# Altium PCB Bluetooth_Sentinel.PcbDoc
Units mm, origin at the board's own origin, x right, y up, seen from the top; angles counter-clockwise.
Board outline 80 x 55 mm, 4 copper layers (Top Layer, Mid-Layer 1, Mid-Layer 2, Bottom Layer), stack 0.796 mm thick; 73 components, 57 nets, 224 pads, 173 vias.
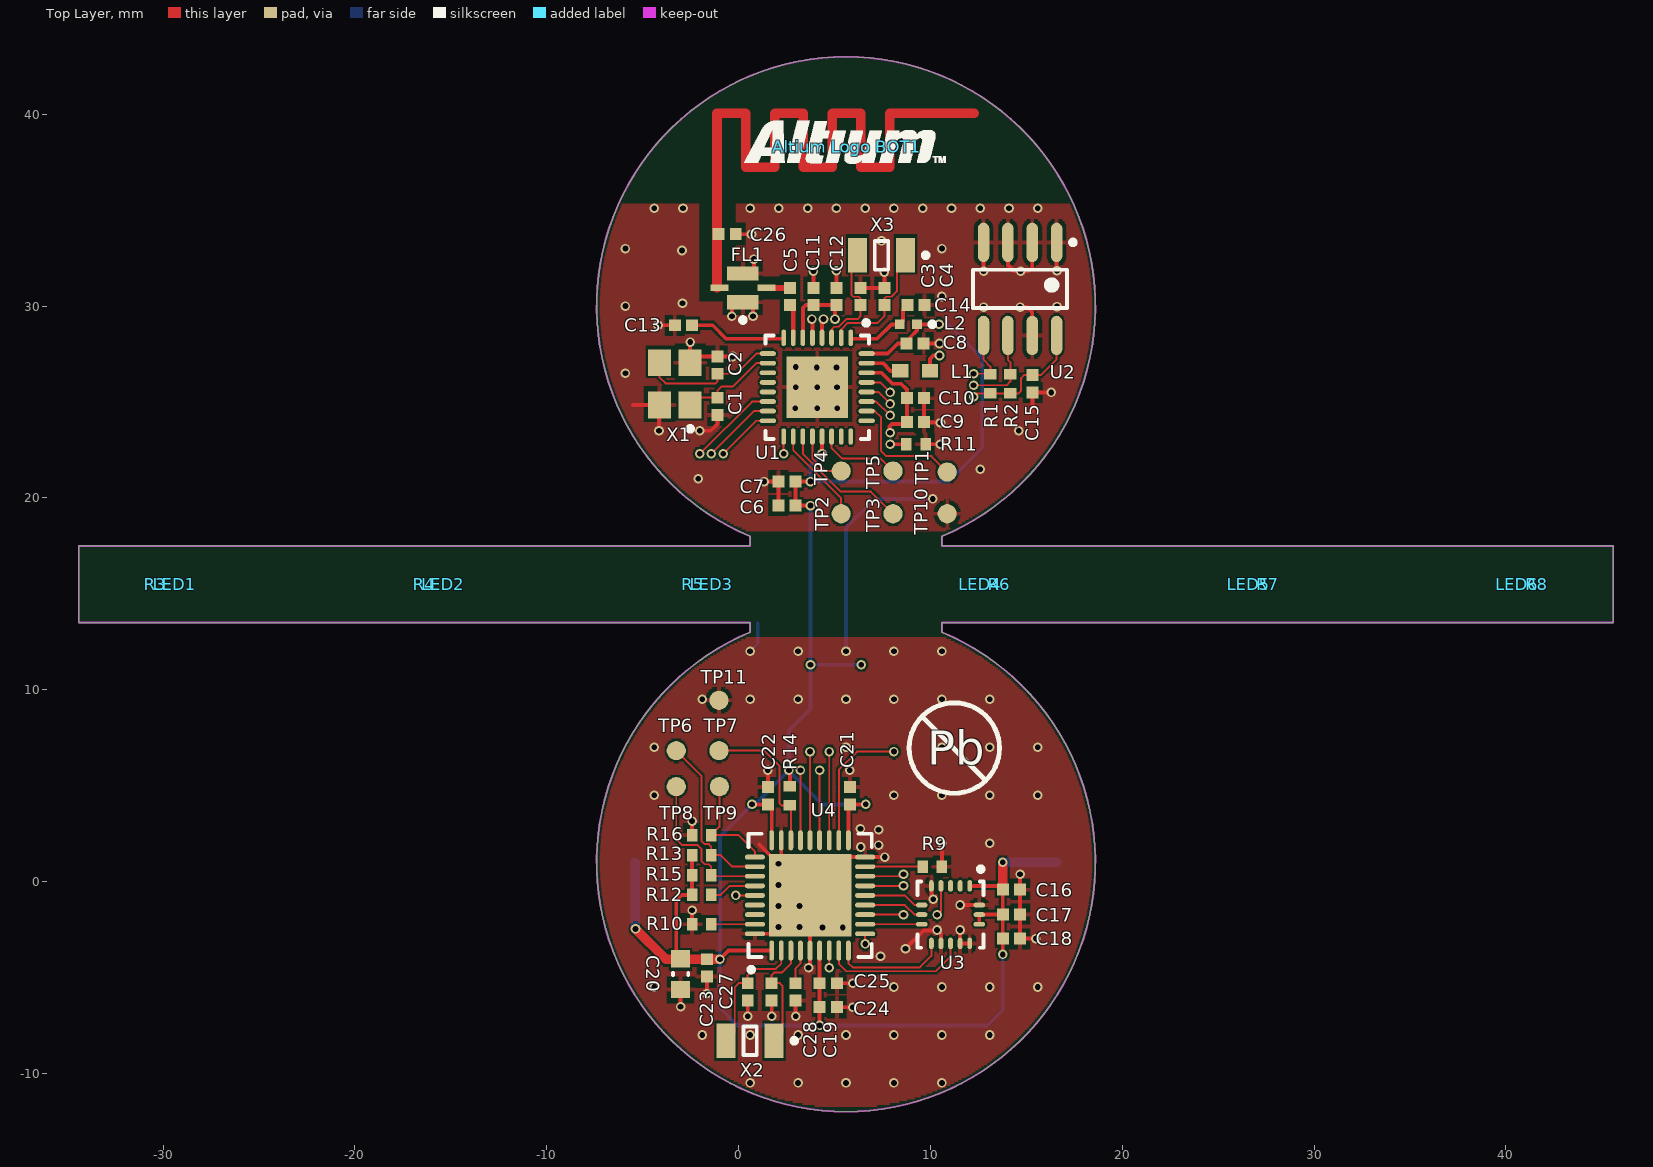
[diagram p0: Top Layer view]
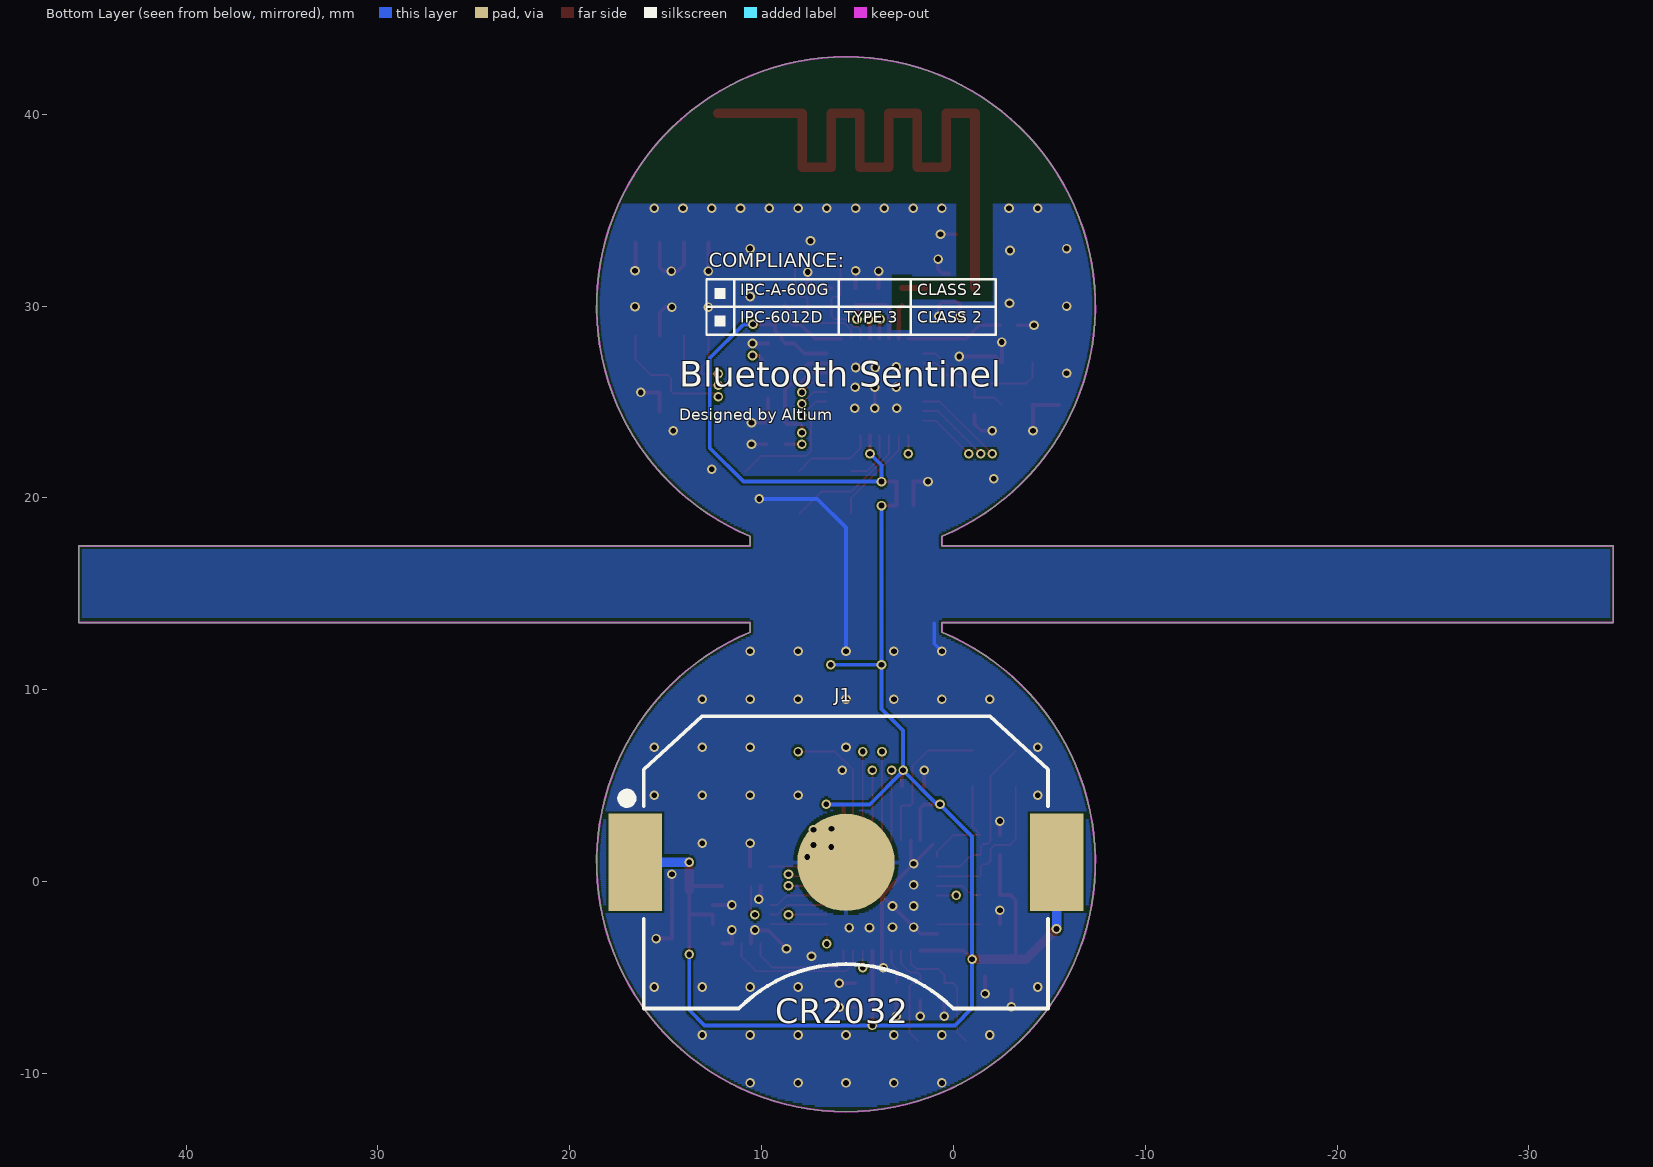
[diagram p1: Bottom Layer view, seen from below]
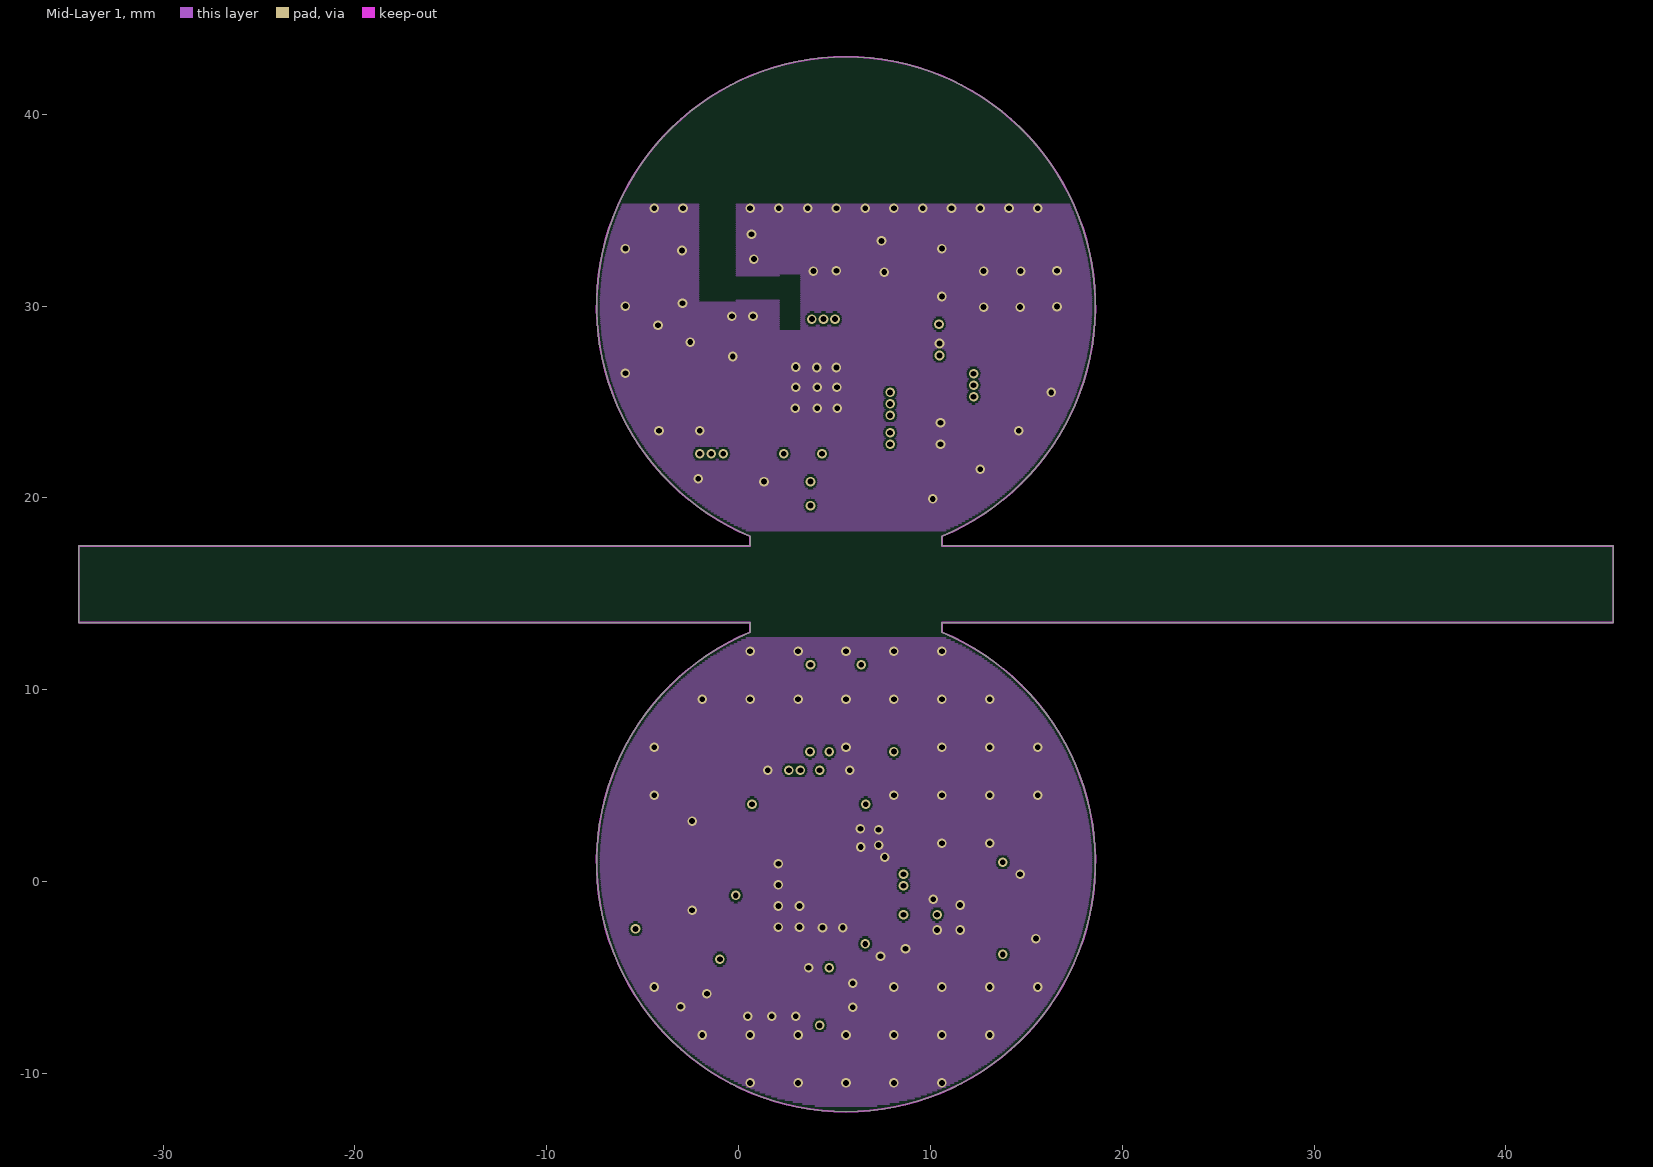
[diagram p2: Mid-Layer 1]
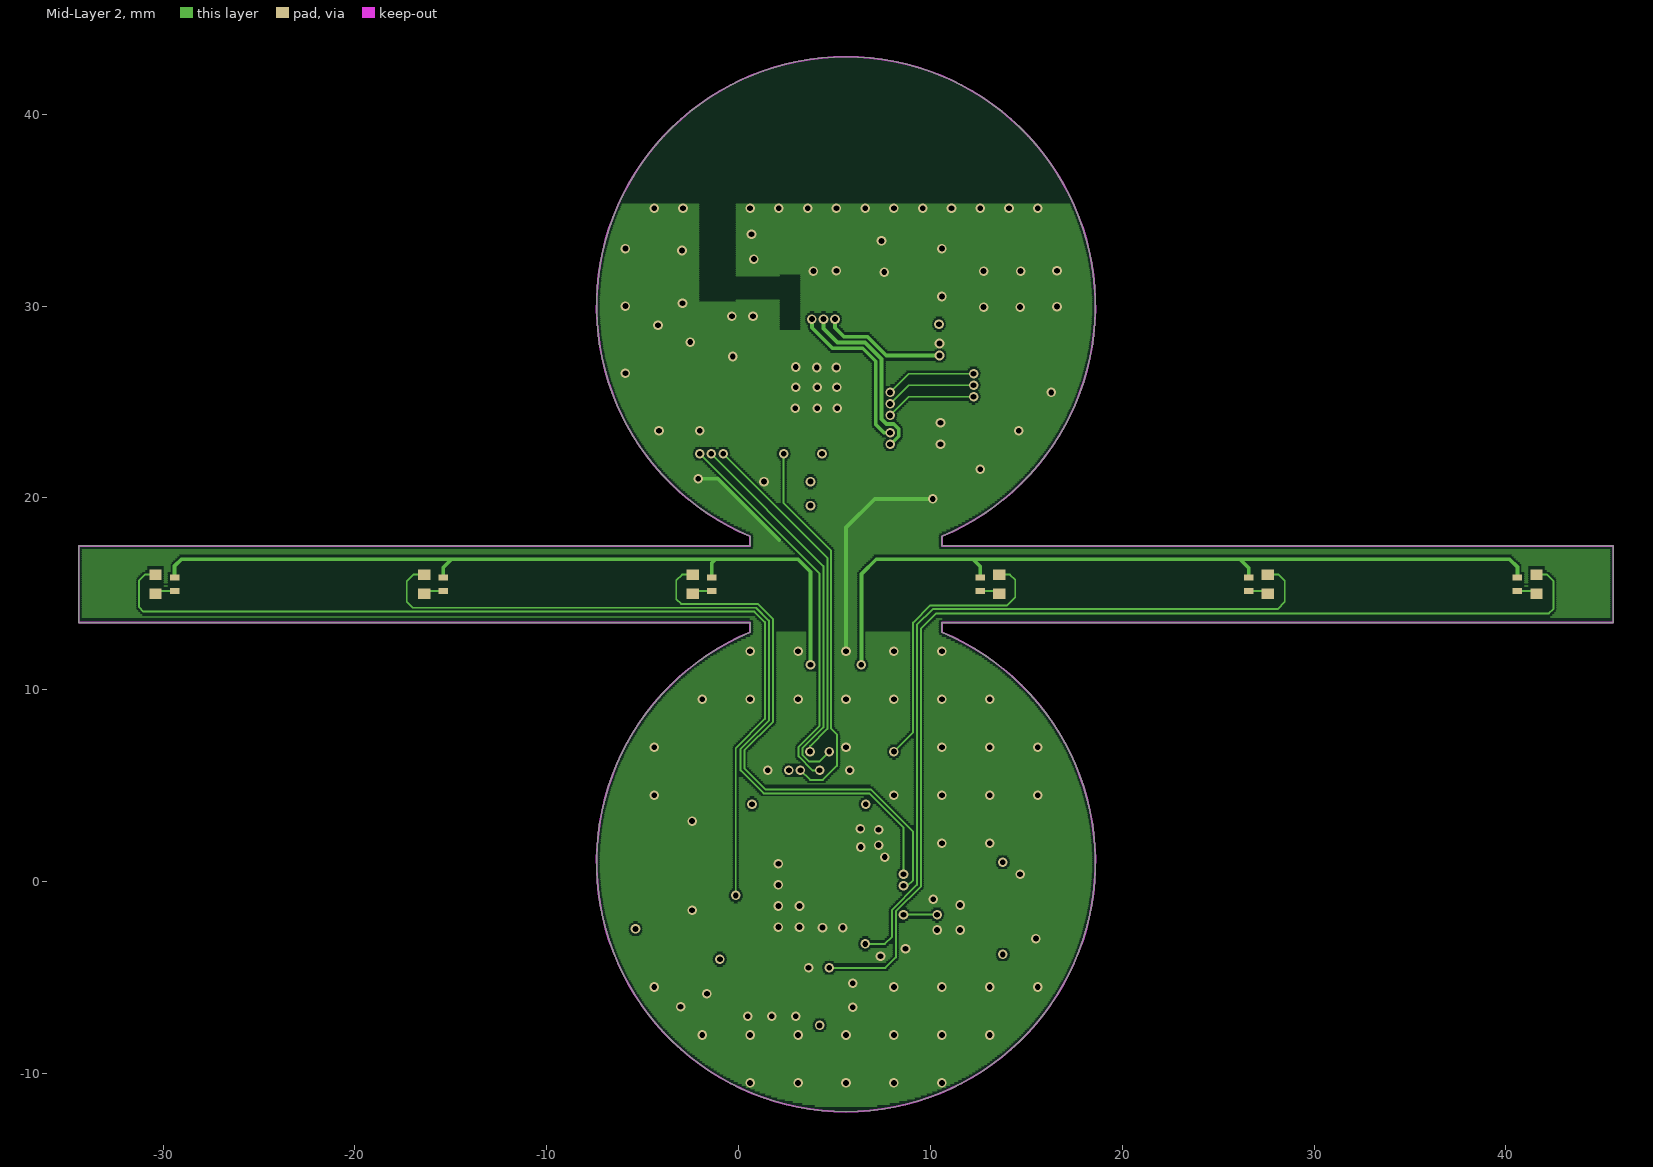
[diagram p3: Mid-Layer 2]

## Layer stack, top to bottom
Top Solder: solder mask 0.01, Solder Resist, Dk 3.5
Top Layer: signal copper 0.036
Dielectric 1: dielectric 0.32, FR-4, Dk 4.8
Mid-Layer 1: signal copper 0.036
Dielectric 2: dielectric 0.32, FR-4, Dk 4.8
Mid-Layer 2: signal copper 0.036
Dielectric 3: dielectric 0.0125, Polyamide, Dk 4.8
Bottom Layer: signal copper 0.036
Bottom Solder: solder mask 0.01, Solder Resist, Dk 3.5

## Board outline
-34.4,13.5 0.6,13.5 0.6,13 ccw(c5.6,1) 10.6,13 10.6,13.5 45.6,13.5 45.6,17.5 10.6,17.5 10.6,18 ccw(c5.6,30) 0.6,18 0.6,17.5 -34.4,17.5
board region "Layer Stack Region 2": 0.6,18 0.085,18.215 -0.905,18.731 -1.848,19.33 -2.735,20.008 -3.561,20.759 -4.319,21.579 -5.005,22.46 -5.612,23.397 -6.137,24.383 -6.575,25.41 -6.924,26.47 -7.181,27.557 -7.343,28.662 -7.41,29.776 -7.381,30.892 -7.257,32.002 -7.038,33.097 -6.726,34.169 -6.323,35.21 -5.833,36.213 -5.258,37.171 -4.603,38.075 -3.873,38.92 -3.074,39.7 -2.21,40.407 -1.289,41.039 -0.317,41.589 0.698,42.053 1.749,42.429 2.829,42.714 3.929,42.904 5.042,43 6.158,43 7.271,42.904 8.371,42.714 9.451,42.429 10.502,42.053 11.517,41.589 12.489,41.039 13.41,40.407 14.274,39.7 15.073,38.92 15.803,38.075 16.458,37.171 17.033,36.213 17.523,35.21 17.926,34.169 18.238,33.097 18.457,32.002 18.581,30.892 18.61,29.776 18.543,28.662 18.381,27.557 18.124,26.47 17.775,25.41 17.337,24.383 16.812,23.397 16.205,22.46 15.519,21.579 14.761,20.759 13.935,20.008 13.048,19.33 12.105,18.731 11.115,18.215 10.6,18
board region "Layer Stack Region 1": 10.6,13 11.115,12.785 12.105,12.269 13.048,11.67 13.935,10.992 14.761,10.241 15.519,9.421 16.205,8.54 16.812,7.603 17.337,6.617 17.775,5.59 18.124,4.53 18.381,3.443 18.543,2.338 18.61,1.224 18.581,0.108 18.457,-1.002 18.238,-2.097 17.926,-3.169 17.523,-4.21 17.033,-5.213 16.458,-6.171 15.803,-7.075 15.073,-7.92 14.274,-8.7 13.41,-9.407 12.489,-10.039 11.517,-10.589 10.502,-11.053 9.451,-11.429 8.371,-11.714 7.271,-11.904 6.158,-12 5.042,-12 3.929,-11.904 2.829,-11.714 1.749,-11.429 0.698,-11.053 -0.317,-10.589 -1.289,-10.039 -2.21,-9.407 -3.074,-8.7 -3.873,-7.92 -4.603,-7.075 -5.258,-6.171 -5.833,-5.213 -6.323,-4.21 -6.726,-3.169 -7.038,-2.097 -7.257,-1.002 -7.381,0.108 -7.41,1.224 -7.343,2.338 -7.181,3.443 -6.924,4.53 -6.575,5.59 -6.137,6.617 -5.612,7.603 -5.005,8.54 -4.319,9.421 -3.561,10.241 -2.735,10.992 -1.848,11.67 -0.905,12.269 0.085,12.785 0.597,12.999
board region "Layer Stack Region 3": 10.6,18 10.6,17.5 45.6,17.5 45.6,13.5 10.6,13.5 10.6,13 0.597,12.999 0.6,13 0.6,13.5 -34.4,13.5 -34.4,17.5 0.6,17.5 0.6,18

## Design rules (kind name [scope] priority, off if disabled: settings)
Clearance [All] p1: gap=0.1 ignorepadtopadclearanceinfootprint=FALSE except(0: Arc-Hole Track-Hole SMDPad-Hole THPad-Hole Via-Hole Fill-Hole Poly-Hole Region-Hole Text-Hole)
ComponentClearance [All] p1: gap=0.2 collisioncheckmode=3 verticalgap=0.2 showdistances=FALSE
DiffPairsRouting [All] p1: maxlimit=0.254 minlimit=0.254 mostfreqgap=0.254 substack1={39C75CA3-85F5-4F93-B76E-2A553D0696AA} toplayer_{39c75ca3-85f5-4f93-b76e-2a553d0696aa}_minwidth=0.381 toplayer_{39c75ca3-85f5-4f93-b76e-2a553d0696aa}_maxwidth=0.381 toplayer_{39c75ca3-85f5-4f93-b76e-2a553d0696aa}_prefwidth=0.381 midlayer1_{39c75ca3-85f5-4f93-b76e-2a553d0696aa}_minwidth=0.381 midlayer1_{39c75ca3-85f5-4f93-b76e-2a553d0696aa}_maxwidth=0.381 midlayer1_{39c75ca3-85f5-4f93-b76e-2a553d0696aa}_prefwidth=0.381 midlayer2_{39c75ca3-85f5-4f93-b76e-2a553d0696aa}_minwidth=0.381 midlayer2_{39c75ca3-85f5-4f93-b76e-2a553d0696aa}_maxwidth=0.381 midlayer2_{39c75ca3-85f5-4f93-b76e-2a553d0696aa}_prefwidth=0.381 bottomlayer_{39c75ca3-85f5-4f93-b76e-2a553d0696aa}_minwidth=0.381 bottomlayer_{39c75ca3-85f5-4f93-b76e-2a553d0696aa}_maxwidth=0.381 bottomlayer_{39c75ca3-85f5-4f93-b76e-2a553d0696aa}_prefwidth=0.381 toplayer_minwidth=0.381 toplayer_maxwidth=0.381 toplayer_prefwidth=0.381 midlayer1_minwidth=0.381 midlayer1_maxwidth=0.381 midlayer1_prefwidth=0.381 midlayer2_minwidth=0.381 midlayer2_maxwidth=0.381 midlayer2_prefwidth=0.381 bottomlayer_minwidth=0.381 bottomlayer_maxwidth=0.381 bottomlayer_prefwidth=0.381 maxuncoupledlength=12.7
HoleToHoleClearance [All] p1: gap=0.1 allowstackedmicrovias=TRUE
MinimumSolderMaskSliver [All] p1: minsoldermaskwidth=0.1
NetAntennae [All] p1: netantennaetolerance=30
PolygonConnect PolygonConnect_PCBModule [InComponentClass('PCBModule')] p1: connectstyle=Direct reliefconductorwidth=0.254 reliefentries=4 polygonreliefangle="90 Angle" airgapwidth=0.254
PolygonConnect PolygonConnect_VIA [IsVia] p2: connectstyle=Direct reliefconductorwidth=0.254 reliefentries=4 polygonreliefangle="90 Angle" airgapwidth=0.254
PolygonConnect [All] p3: connectstyle=Relief reliefconductorwidth=0.2 reliefentries=4 polygonreliefangle="90 Angle" airgapwidth=0.2
RoutingVias [All] p1: holewidth=0.3 width=0.5 viastyle="Through Hole" minholewidth=0.3 minwidth=0.5 maxholewidth=0.3 maxwidth=0.5
SilkToSilkClearance SilkToSilkClearance_1 [(ObjectKind = 'Text') And (StringText = 'Designed & Made in China') vs (ObjectKind = 'Text') And (StringText = 'Digital Designer Board')] p1: silktosilkclearance=0
SilkToSilkClearance [All] p2: silktosilkclearance=0
SilkToSolderMaskClearance [IsPad] p1: minsilkscreentomaskgap=0.1 clearancetoexposedcopper=TRUE
SolderMaskExpansion [All] p1: expansion=0 istentingtop=FALSE
Width [All] p1: maxlimit=0.5 minlimit=0.1 preferedwidth=0.1 substack1={39C75CA3-85F5-4F93-B76E-2A553D0696AA} minimp=50.000000 maximp=50.000000 favimp=50.000000
23 further rules are at their usual default settings.

## Classes and differential pairs
component class LC_Filter: C5 C26 FL1
component class BT_ANTMATCH: C5 C26
component class Programmer: TP1 TP2 TP3 TP4 TP5 TP10
component class Microcontroller_STM32F101: C19 C20 C21 C22 C23 C24 C25 R9 R10 R12 R13 R14 R15 R16 U4
component class Accelerometer: C16 C17 C18 U3
component class Red_LED6: LED6 R8 R10_U_LED6
component class Red_LED5: LED5 R7 R10_U_LED5
component class Red_LED4: LED4 R6 R10_U_LED4
component class Red_LED3: LED3 R5 R10_U_LED3
component class Red_LED2: LED2 R4 R10_U_LED2
component class Red_LED1: LED1 R3 R10_U_LED1
component class U_JTAG_TP: TP6 TP8 TP9
component class BT_RF_FILTER: FL1
component class BLUETOOTH: C6 C7 C8 C9 C10 C11 C12 C13 C14 L1 L2 R11 U1
component class "U_BT_1V8TX TO 3VTX2": "Q1_U_BT_1V8TX TO 3VTX2"
component class "U_BT_1V8TX TO 3VTX1": "Q1_U_BT_1V8TX TO 3VTX1"
component class EEPROM: C15 "Q1_U_BT_1V8RX TO 3VRX2" R1 R2 U2
component class Programmer: "Q1_U_BT_1V8RX TO 3VRX1" TP6 TP7 TP8 TP9 TP11
component class Power: J1
component class Q2: C3 C4 X3
component class 16MHz_Clock: C1 C2 X1
component class Q1: C27 C28 X2
component class "BOOT MODE": R9 R10
channel class Oscillator_32_768KHz: Q1 Q2
channel class Red_LED: Red_LED1 Red_LED2 Red_LED3 Red_LED4 Red_LED5 Red_LED6

## Components (designator, comment, footprint, x,y, rotation, side; value= is the part's Value field where it differs from the comment)
"Altium Logo BOT1" "Altium(2009)" LOGO-ALTIUM-NEW 5.65,38.3 r0 top
C1 "CAP 20pF 10V 0402(1005)" CAPC0402(1005)60_N -1.1,24.775 r270 top value=20pF
C2 "CAP 20pF 10V 0402(1005)" CAPC0402(1005)60_N -1.1,26.925 r90 top value=20pF
C3 "CAP 24pF 10V 0402(1005)" CAPC0402(1005)60_N 6.35,30.5 r270 top value=24pF
C4 "CAP 24pF 10V 0402(1005)" CAPC0402(1005)60_N 7.6,30.5 r270 top value=24pF
C5 "CAP 22pF 16V 0402(1005)" CAPC0402(1005)60_N 2.675,30.5 r90 top value=22pF (schematic designator C14)
C6 "CAP 2.2uF 6.3V 0402(1005)" CAPC0402(1005)60_N 2.525,19.6 r0 top value=2.2uF (schematic designator C5)
C7 "CAP 100nF 6.3V 0402(1005)" CAPC0402(1005)60_N 2.525,20.85 r0 top value=100nF (schematic designator C6)
C8 "CAP 100nF 6.3V 0402(1005)" CAPC0402(1005)60_N 9.2,28.05 r180 top value=100nF (schematic designator C7)
C9 "CAP 470nF 6.3V 0402(1005)" CAPC0402(1005)60_N 9.225,23.95 r180 top value=470nF (schematic designator C8)
C10 "CAP 100nF 6.3V 0402(1005)" CAPC0402(1005)60_N 9.225,25.2 r180 top value=100nF (schematic designator C9)
C11 "CAP 2.2uF 6.3V 0402(1005)" CAPC0402(1005)60_N 3.9,30.5 r270 top value=2.2uF (schematic designator C10)
C12 "CAP 470nF 6.3V 0402(1005)" CAPC0402(1005)60_N 5.1,30.5 r270 top value=470nF (schematic designator C11)
C13 "CAP 470nF 6.3V 0402(1005)" CAPC0402(1005)60_N -2.875,29 r0 top value=470nF (schematic designator C12)
C14 "CAP 33pF 10V 0402(1005)" CAPC0402(1005)60_N 9.25,30.05 r180 top value=33pF (schematic designator C13)
C15 "CAP 1uF 6.3V 0402(1005)" CAPC0402(1005)60_N 15.325,25.95 r90 top value=1uF (schematic designator C22)
C16 "CAP 100nF 16V 0402(1005)" CAPC0402(1005)60_N 14.225,-0.425 r0 top value=100nF (schematic designator C27)
C17 "CAP 100nF 16V 0402(1005)" CAPC0402(1005)60_N 14.225,-1.725 r180 top value=100nF (schematic designator C28)
C18 "CAP 1uF 16V 0402(1005)" CAPC0402(1005)60_N 14.225,-2.975 r0 top value=1uF (schematic designator C29)
C19 "CAP 100nF 6.3V 0402(1005)" CAPC0402(1005)60_N 2.975,-5.75 r270 top value=100nF (schematic designator C15)
C20 "CAP 10uF 10V 0603(1608)" CAPC0603(1608)100_N -3.025,-4.825 r90 top value=10uF (schematic designator C16)
C21 "CAP 100nF 6.3V 0402(1005)" CAPC0402(1005)60_N 5.8,4.475 r270 top value=100nF (schematic designator C17)
C22 "CAP 100nF 6.3V 0402(1005)" CAPC0402(1005)60_N 1.525,4.475 r270 top value=100nF (schematic designator C18)
C23 "CAP 100nF 6.3V 0402(1005)" CAPC0402(1005)60_N -1.65,-4.5 r90 top value=100nF (schematic designator C19)
C24 "CAP 1uF 6.3V 0402(1005)" CAPC0402(1005)60_N 4.675,-6.55 r180 top value=1uF (schematic designator C20)
C25 "CAP 100nF 6.3V 0402(1005)" CAPC0402(1005)60_N 4.675,-5.3 r180 top value=100nF (schematic designator C21)
C26 "CAP 1.5pF 10V 0402(1005)" CAPC0402(1005)60_N -0.6,33.75 r180 top value=1.5pF
C27 "CAP 24pF 10V 0402(1005)" CAPC0402(1005)60_N 0.475,-5.75 r90 top value=24pF (schematic designator C3)
C28 "CAP 24pF 10V 0402(1005)" CAPC0402(1005)60_N 1.725,-5.75 r90 top value=24pF (schematic designator C4)
FL1 "LFB212G45SG8A143" MUR-LFB212G45SG8A143-4 0.225,30.95 r180 top
J1 "BK-912-TR" MPD-CN-DIN-3_V 5.6,1 r180 bottom
L1 "7447966" SMD-0603 9.2,26.625 r0 top
L2 "MMZ1005Y152CT" TDK-CHIP-2_V 8.85,29.05 r180 top
LED1 "LNJ247W82RA" PNSC-CHIP-2_V -29.4,15.5 r90 top
LED2 "LNJ247W82RA" PNSC-CHIP-2_V -15.4,15.5 r90 top (schematic designator LED1)
LED3 "LNJ247W82RA" PNSC-CHIP-2_V -1.4,15.5 r90 top (schematic designator LED1)
LED4 "LNJ247W82RA" PNSC-CHIP-2_V 12.6,15.5 r90 top (schematic designator LED1)
LED5 "LNJ247W82RA" PNSC-CHIP-2_V 26.6,15.5 r90 top (schematic designator LED1)
LED6 "LNJ247W82RA" PNSC-CHIP-2_V 40.6,15.5 r90 top (schematic designator LED1)
R1 "4K7 5% 0402(1005)" RESC0402(1005)_N#1 13.125,25.95 r270 top value=4.7K (schematic designator R9)
R2 "4K7 5% 0402(1005)" RESC0402(1005)_N#1 14.175,25.95 r270 top value=4.7K (schematic designator R10)
R3 "200R 5% 0402(1005)" RESC0402(1005)_N#2 -30.4,15.5 r270 top value=200R (schematic designator R1)
R4 "200R 5% 0402(1005)" RESC0402(1005)_N#2 -16.4,15.5 r270 top value=200R (schematic designator R1)
R5 "200R 5% 0402(1005)" RESC0402(1005)_N#2 -2.4,15.5 r270 top value=200R (schematic designator R1)
R6 "200R 5% 0402(1005)" RESC0402(1005)_N#2 13.6,15.5 r270 top value=200R (schematic designator R1)
R7 "200R 5% 0402(1005)" RESC0402(1005)_N#2 27.6,15.5 r270 top value=200R (schematic designator R1)
R8 "200R 5% 0402(1005)" RESC0402(1005)_N#2 41.6,15.5 r270 top value=200R (schematic designator R1)
R9 "10K 5% 0402(1005)" RESC0402(1005)_N#1 10.1,0.775 r0 top value=10K
R10 "10K 5% 0402(1005)" RESC0402(1005)_N#1 -1.925,-2.225 r180 top value=10K
R11 "Jumper 0402(1005)" RESC0402(1005)_N#1 9.25,22.8 r0 top value=0R (schematic designator R16)
R12 "10K 5% 0402(1005)" RESC0402(1005)_N#1 -1.925,-0.7 r180 top value=10K (schematic designator R11)
R13 "10K 5% 0402(1005)" RESC0402(1005)_N#1 -1.925,1.375 r180 top value=10K (schematic designator R12)
R14 "10K 5% 0402(1005)" RESC0402(1005)_N#1 2.675,4.475 r90 top value=10K (schematic designator R13)
R15 "10K 5% 0402(1005)" RESC0402(1005)_N#1 -1.925,0.325 r180 top value=10K (schematic designator R14)
R16 "10K 5% 0402(1005)" RESC0402(1005)_N#1 -1.925,2.425 r0 top value=10K (schematic designator R15)
TP1 "TP-SM-C-100" TP-SM-C-100 10.875,21.35 r90 top (schematic designator TP5)
TP2 "TP-SM-C-100" TP-SM-C-100 5.35,19.175 r90 top (schematic designator TP6)
TP3 "TP-SM-C-100" TP-SM-C-100 8.05,19.175 r90 top (schematic designator TP7)
TP4 "TP-SM-C-100" TP-SM-C-100 5.35,21.4 r90 top (schematic designator TP8)
TP5 "TP-SM-C-100" TP-SM-C-100 8.05,21.4 r90 top (schematic designator TP9)
TP6 "TP-SM-C-100" TP-SM-C-100 -3.25,6.825 r0 top (schematic designator TP1)
TP7 "TP-SM-C-100" TP-SM-C-100 -1.025,6.825 r90 top (schematic designator TP2)
TP8 "TP-SM-C-100" TP-SM-C-100 -3.25,4.95 r90 top (schematic designator TP3)
TP9 "TP-SM-C-100" TP-SM-C-100 -1,4.95 r90 top (schematic designator TP4)
TP10 "TP-SM-C-100" TP-SM-C-100 10.875,19.175 r90 top
TP11 "TP-SM-C-100" TP-SM-C-100 -1.025,9.45 r90 top
U1 "CSR1010A05-IQQM-R" CSR-CSR1010A05-IQQM-R-QFN32_M 4.1,25.775 r270 top (schematic designator U4)
U2 "24AA512-I/SN" MCHP-SOIC-SN8_N 14.675,30.9 r270 top (schematic designator U3)
U3 "LIS331DLTR" LGA16-3X3X1_L 11.05,-1.725 r270 top (schematic designator U1)
U4 "STM32F101T6U6A" VFQFPN36_N 3.725,-0.725 r90 top (schematic designator U2)
X1 "21C00047-16.000MHz" ITTI-21C00047-16.000MHz-4_V -3.325,25.95 r90 top
X2 "14340272-32.768KHz" ITTI-14340272-32.768KHz-2_V 0.6,-8.3 r180 top
X3 "14340272-32.768KHz" ITTI-14340272-32.768KHz-2_V 7.45,32.65 r180 top (schematic designator X2)

## Footprints (in the part's own frame and the unit in brackets; to place one, negate y for a bottom-side part, rotate by r counter-clockwise, add the part's x,y. Pads: shape width x height; smd on the part's side, far side on the other; paste and mask are expansions set on the pad)
CAPC0402(1005)60_N [mm] "Chip Capacitor, Body 1.0x0.5mm, Height 0.6mm, IPC Medium Density"
  rect 0.62x0.62 smd: 1(-0.45,0) 2(0.45,0)
  body extent -0.55,-0.3 0.55,0.3, height 0.6
CAPC0603(1608)100_N [mm] "Chip Capacitor, Body 1.6x0.8mm, Height 1.0mm, IPC Medium Density"
  rect 0.9x1 smd: 1(-0.8,0) 2(0.8,0)
  silkscreen extent -0.05,-0.4 0.05,0.4, body extent -0.87,-0.48 0.88,0.47, height 1
CSR-CSR1010A05-IQQM-R-QFN32_M [mm] "QFN, 32-Leads, Body 5.1x5.1mm, Pitch 0.5mm, Thermal Pad 3.2x3.2mm, IPC Low Density"
  oval 0.85x0.25 smd: 1(-2.575,1.75) 2(-2.575,1.25) 3(-2.575,0.75) 4(-2.575,0.25) 5(-2.575,-0.25) 6(-2.575,-0.75) 7(-2.575,-1.25) 8(-2.575,-1.75) 17(2.575,-1.75) 18(2.575,-1.25) 19(2.575,-0.75) 20(2.575,-0.25) 21(2.575,0.25) 22(2.575,0.75) 23(2.575,1.25) 24(2.575,1.75)
  oval 0.25x0.85 smd: 9(-1.75,-2.575) 10(-1.25,-2.575) 11(-0.75,-2.575) 12(-0.25,-2.575) 13(0.25,-2.575) 14(0.75,-2.575) 15(1.25,-2.575) 16(1.75,-2.575) 25(1.75,2.575) 26(1.25,2.575) 27(0.75,2.575) 28(0.25,2.575) 29(-0.25,2.575) 30(-0.75,2.575) 31(-1.25,2.575) 32(-1.75,2.575)
  rect 3.2x3.2 smd: 33(0,0)
  silkscreen extent -3.47,-2.7 2.7,2.7, body extent -2.55,-2.55 2.55,2.55, height 0.6
ITTI-21C00047-16.000MHz-4_V [mm] "Hand Drawn, 4-Leads, Body 3.2x2.5 mm"
  rect 1.4x1.2 smd: 1(-1.1,-0.8) 2(1.1,-0.8) 3(1.1,0.8) 4(-1.1,0.8)
  silkscreen extent -2.47,-0.93 -2.23,-0.68, body extent -1.6,-1.25 1.6,1.25, height 0.9
ITTI-14340272-32.768KHz-2_V [mm] "Hand Drawn, 2-Leads, Body 3.2x1.5mm, Pitch 2.5mm"
  rect 1x1.8 smd: 1(-1.25,0) 2(1.25,0)
  silkscreen extent -2.43,-0.75 0.35,0.75, body extent -1.6,-0.75 1.6,0.75, height 0.9
LGA16-3X3X1_L [mm] "PQFN, 16-Leads, Body 3x3mm, Pitch 0.5mm, IPC High Density"
  oval 0.6x0.25 smd: 1(-1.5,1) 2(-1.5,0.5) 3(-1.5,0) 4(-1.5,-0.5) 5(-1.5,-1) 9(1.5,-1) 10(1.5,-0.5) 11(1.5,0) 12(1.5,0.5) 13(1.5,1)
  oval 0.25x0.6 smd: 6(-0.5,-1.5) 7(0,-1.5) 8(0.5,-1.5) 14(0.5,1.5) 15(0,1.5) 16(-0.5,1.5)
  silkscreen extent -2.5,-1.73 1.73,1.73, body extent -1.58,-1.58 1.58,1.58, height 1
LOGO-ALTIUM-NEW [mm]
  silkscreen extent -5.36,-0.87 5.14,1.36
MCHP-SOIC-SN8_N [mm] "SOIC, 8-Leads, Body 4.9x3.9mm, Pitch 1.27mm, IPC Medium Density"
  oval 2.05x0.6 smd: 1(-2.425,1.905) 2(-2.425,0.635) 3(-2.425,-0.635) 4(-2.425,-1.905) 5(2.425,-1.905) 6(2.425,-0.635) 7(2.425,0.635) 8(2.425,1.905)
  silkscreen extent -2.55,-2.45 1,2.88, body extent -1.95,-2.45 1.95,2.45, height 1.75
MPD-CN-DIN-3_V [mm] "CN-DIN, 3-Leads, Body 21.08x15.24mm"
  rect 2.79x5.08 smd: 1(-10.985,0) 2(10.985,0)
  round 5.08 smd: 3(0,0)
  silkscreen extent -11.68,-7.62 10.54,7.62, body extent -10.54,-10 10.57,10, height 4.1
MUR-LFB212G45SG8A143-4 [mm] "Hand Drawn, 4-Leads, Body 2x1.25mm"
  rect 1.65x0.75 smd: 1(0,0.75) 3(0,-0.75)
  rect 0.95x0.35 smd: 2(1.225,0) 4(-1.225,0)
  silkscreen extent -0.13,1.55 0.12,1.8, body extent -1,-0.63 1,0.63, height 0.95
PNSC-CHIP-2_V [mm] "CHIP, 2-Leads, Body 1x0.5mm, Pitch 0.7mm"
  rect 0.3x0.5 on Mid2: 1(0.35,0) 2(-0.35,0)
  body extent -0.5,-0.25 0.5,0.25, height 0.25
RESC0402(1005)_N#1 [mm] "Chip Resistor, Body 1.0x0.5mm, IPC Medium Density"
  rect 0.55x0.65 smd: 1(-0.5,0) 2(0.5,0)
  body extent -0.52,-0.27 0.53,0.28, height 0.4
RESC0402(1005)_N#2 [mm] "Chip Resistor, Body 1.0x0.5mm, IPC Medium Density"
  rect 0.55x0.65 on Mid2: 1(-0.5,0) 2(0.5,0)
  body extent -0.52,-0.27 0.53,0.28, height 0.4
SMD-0603 [mm] "Chip Inductor, 2-Leads, Body 1.6x0.8mm"
  rect 0.85x0.7 smd: 1(-0.775,0) 2(0.775,0)
  body extent -0.8,-0.4 0.8,0.4, height 0.79
TDK-CHIP-2_V [mm] "CHIP, 2-Leads, Body 1x0.5mm, Pitch 0.9mm"
  rect 0.5x0.5 smd: 1(-0.45,0) 2(0.45,0)
  silkscreen extent -1.38,-0.12 -1.13,0.12, body extent -0.5,-0.25 0.5,0.25, height 0.5
TP-SM-C-100 [mm] "Test Point, Surface Mounting, Circular, Pad Diameter 1mm"
  round 1 smd: 1(0,0)
VFQFPN36_N [mm] "QFN, 36-Leads, Body 6x6mm, Pitch 0.5mm, Thermal Pad 4.3x4.3mm, IPC Medium Density"
  oval 1.05x0.25 smd: 1(-2.875,2) 2(-2.875,1.5) 3(-2.875,1) 4(-2.875,0.5) 5(-2.875,0) 6(-2.875,-0.5) 7(-2.875,-1) 8(-2.875,-1.5) 9(-2.875,-2) 19(2.875,-2) 20(2.875,-1.5) 21(2.875,-1) 22(2.875,-0.5) 23(2.875,0) 24(2.875,0.5) 25(2.875,1) 26(2.875,1.5) 27(2.875,2)
  oval 0.25x1.05 smd: 10(-2,-2.875) 11(-1.5,-2.875) 12(-1,-2.875) 13(-0.5,-2.875) 14(0,-2.875) 15(0.5,-2.875) 16(1,-2.875) 17(1.5,-2.875) 18(2,-2.875) 28(2,2.875) 29(1.5,2.875) 30(1,2.875) 31(0.5,2.875) 32(0,2.875) 33(-0.5,2.875) 34(-1,2.875) 35(-1.5,2.875) 36(-2,2.875)
  rect 4.3x4.3 smd: 37(0,0)
  silkscreen extent -3.99,-3.21 3.21,3.21, body extent -3.07,-3.07 3.07,3.07, height 1

## Part data
"Altium Logo BOT1": library part CMP-9999-00125-1, "Alitum Logo"
C1 C2: library part CMP-1034-00871-1, "CAP 20pF 10V ±0.25pF 0402 (1005 Metric) Thickness 0.6mm SMD", Case-EIA=0402, Case-Metric=1005, Rated Voltage="10 V", Tolerance=±0.25pF, Max Thickness="0.6 mm", Technology=SMT
C3 C4 C27 C28: library part CMP-1034-00923-1, "CAP 24pF 10V ±0.25pF 0402 (1005 Metric) Thickness 0.6mm SMD", Case-EIA=0402, Case-Metric=1005, Rated Voltage="10 V", Tolerance=±0.25pF, Max Thickness="0.6 mm", Technology=SMT
C5: library part CMP-1034-00899-1, "CAP 22pF 16V ±0.25pF 0402 (1005 Metric) Thickness 0.6mm SMD", Case-EIA=0402, Case-Metric=1005, Rated Voltage="16 V", Tolerance=±0.25pF, Max Thickness="0.6 mm", Technology=SMT
C6 C11: library part CMP-1034-02125-1, "CAP 2.2uF 6.3V ±10% 0402 (1005 Metric) Thickness 0.6mm SMD", Case-EIA=0402, Case-Metric=1005, Rated Voltage="6.3 V", Tolerance=±10%, Max Thickness="0.6 mm", Technology=SMT
C7 C8 C10 C19 C21 C22 C23 C25: library part CMP-1034-02060-1, "CAP 100nF 6.3V ±5% 0402 (1005 Metric) Thickness 0.6mm SMD", Case-EIA=0402, Case-Metric=1005, Rated Voltage="6.3 V", Tolerance=±5%, Max Thickness="0.6 mm", Technology=SMT
C9 C12 C13: library part CMP-1034-02103-1, "CAP 470nF 6.3V ±10% 0402 (1005 Metric) Thickness 0.6mm SMD", Case-EIA=0402, Case-Metric=1005, Rated Voltage="6.3 V", Tolerance=±10%, Max Thickness="0.6 mm", Technology=SMT
C14: library part CMP-1034-00985-1, "CAP 33pF 10V ±0.5pF 0402 (1005 Metric) Thickness 0.6mm SMD", Case-EIA=0402, Case-Metric=1005, Rated Voltage="10 V", Tolerance=±0.5pF, Max Thickness="0.6 mm", Technology=SMT
C15 C24: library part CMP-1034-02113-1, "CAP 1uF 6.3V ±10% 0402 (1005 Metric) Thickness 0.6mm SMD", Case-EIA=0402, Case-Metric=1005, Rated Voltage="6.3 V", Tolerance=±10%, Max Thickness="0.6 mm", Technology=SMT
C16 C17: library part CMP-1034-02069-1, "CAP 100nF 16V ?0% 0402 (1005 Metric) Thickness 0.6mm SMD", Case-EIA=0402, Case-Metric=1005, Rated Voltage="16 V", Tolerance=?0%, Max Thickness="0.6 mm", Technology=SMT
C18: library part CMP-1034-02119-1, "CAP 1uF 16V ?0% 0402 (1005 Metric) Thickness 0.6mm SMD", Case-EIA=0402, Case-Metric=1005, Rated Voltage="16 V", Tolerance=?0%, Max Thickness="0.6 mm", Technology=SMT
C20: library part CMP-1035-02800-1, "CAP 10uF 10V ±20% 0603 (1608 Metric) Thickness 1mm SMD", Case-EIA=0603, Case-Metric=1608, Rated Voltage="10 V", Tolerance=±20%, Max Thickness="1 mm", Technology=SMT
C26: library part CMP-1034-00102-1, "CAP 1.5pF 10V ±0.1pF 0402 (1005 Metric) Thickness 0.6mm SMD", Case-EIA=0402, Case-Metric=1005, Rated Voltage="10 V", Tolerance=±0.1pF, Max Thickness="0.6 mm", Technology=SMT
FL1: library part CMP-0453-00001-1, "LFB21(0805)_SG Series Filter for Wireless LAN/Bluetooth, 2400-2500 MHz, 2 x 1.25 x 0.95 mm", Attenuation (Absolute Value) I) (dB)="20 min. at 880-1710 MHz", Attenuation (Absolute Value) II) (dB)="30 min. at 1710~1990MHz", Manufacturer=Murata, Nominal Center Frequency (fo)="2450 MHz", Bandwidth (BW)="2450 +/-50MHz", ComponentLink1Description="Manufacturer URL", ComponentLink1URL=http://www.murata.com/, ComponentLink2Description=Datasheet, ComponentLink2URL=http://www.murata.com/products/catalog/pdf/k99/k99e_l0270.pdf, ComponentLink3Description="Package Specification", ComponentLink3URL=http://search.murata.co.jp/Ceramy/CatalogAction.do?sHinnm=?%C2%A0&sNHinnm=LFB212G45SG8A143&sNhin_key=LFB212G45SG8A143&sLang=en&sParam=LFB21, DatasheetVersion=Dec-10, Insertion Loss in BW (dB) max=2.7, Mounting Technology="Surface Mount", PackageDescription="4-Pin Hand drawn, Body 2x1.25mm", PackageReference=LFB212G45SG8A143-4, Packing="Tape and Reel", PartNumber=LFB212G45SG8A143
J1: library part CMP-0452-00001-2, "Coin Cell Holder, 21.08 x 15.24 mm SMD", Manufacturer="Memory Protection Devices", Battery Series=2032, Battery Type, Function="Coin Cell, Retainer", Category="Battery Products", ComponentLink1Description="Manufacturer URL", ComponentLink1URL=http://www.memoryprotectiondevices.com/, ComponentLink2Description=Datasheet, ComponentLink2URL=http://www.memoryprotectiondevices.com/datasheets/BK-912-datasheet.pdf, ComponentLink3Description="Package Specification", ComponentLink3URL=http://www.memoryprotectiondevices.com/datasheets/BK-912-datasheet.pdf, Family="Battery Holders, Clips, Contacts", Mounting Technology="Surface Mount", Number of Cells=1, PackageDescription="3-Pin, CN-DIN, Body 21.08x15.24mm", PackageReference=CN-DIN-3, PartNumber=BK-912-TR
L1: library part CMP-0221-00043-1, "SMD-Multilayer Inductor WE-MI, L = 4.70 µH", Inductance="4.70 µH", ComponentLink1Description="Manufacturer Link", ComponentLink1URL=http://www.we-online.com, ComponentLink2Description=Datasheet, ComponentLink2URL=http://www.we-online.de/katalog/media/pdf/7447966.pdf, DatasheetVersion="ver 5, Oct-2004", PackageDescription="Chip Inductor, 2-Leads, Body 1.6 x 0.8 mm", PackageReference=SMD-0603, PackageVersion=2009
L2: library part CMP-0457-00001-1, "Chip Bead for Signal Line, 1500 ohm at 100 MHz, -55 to 125 degC, 1.0 x 1.0 x 0.5 mm SMD", DC Resistance (ohm) max=1, Manufacturer=TDK, Operating Temperature="-55 to 125 degC", Rated Current (mA) max=100, Tolerance="+/- 25%", ComponentLink1Description="Manufacturer URL", ComponentLink1URL=http://www.tdk.co.jp, ComponentLink2Description=Datasheet, ComponentLink2URL=https://www.tdk.co.jp/tefe02/e9412_mmz.pdf, ComponentLink3Description="Package Specification", ComponentLink3URL=https://www.tdk.co.jp/tefe02/e9412_mmz.pdf, Impedance [100MHz] (ohm)=1500, Mounting Technology="Surface Mount", PackageDescription="2-Pin, CHIP, Body 1x0.5mm, Pitch 0.9mm", PackageReference=CHIP-2, PartNumber=MMZ1005Y152CT
LED1 LED2 LED3 LED4 LED5 LED6: library part CMP-0456-00001-1, "Hight Bright Surface Mounting Chip LED (Red), 55 mW, -30 to 85 degC, 1.0 x 0.5 x 0.2 mm SMD", Forward Voltage="1.95 V", Manufacturer=Panasonic, Reverse Current="100 uA", ComponentLink1Description="Manufacturer URL", ComponentLink1URL=http://www.semicon.panasonic.co.jp/en/, ComponentLink2Description=Datasheet, ComponentLink2URL=http://www.semicon.panasonic.co.jp/ds4/LNJ247W82RA_E.pdf, ComponentLink3Description="Package Specification", ComponentLink3URL=http://www.semicon.panasonic.co.jp/ds4/LNJ247W82RA_E.pdf, Dominant Emission Wavelength="630 nm", Luminous Intensity="16 mcd", Mounting Technology="Surface Mount", PackageDescription="2-Pin CHIP, Body 1x0.5mm, Pitch 0.7mm", PackageReference=CHIP-2, PartNumber=LNJ247W82RA, Peak Emission Wavelength="645 nm", Spectral half band width="20 nm"
R1 R2: library part CMP-1011-00090-1, "4K7 0.063W 5% 0402 (1005 Metric)  SMD", Case-EIA=0402, Case-Metric=1005, Power="0.063 W", Tolerance="5 %", Technology=SMT
R3 R4 R5 R6 R7 R8: library part CMP-1011-00057-1, "200R 0.063W 5% 0402 (1005 Metric)  SMD", Case-EIA=0402, Case-Metric=1005, Power="0.063 W", Tolerance="5 %", Technology=SMT
R9 R10 R12 R13 R14 R15 R16: library part CMP-1011-00098-1, "10K 0.063W 5% 0402 (1005 Metric)  SMD", Case-EIA=0402, Case-Metric=1005, Power="0.063 W", Tolerance="5 %", Technology=SMT
R11: library part CMP-1011-00001-1, "Jumper 0402 (1005 Metric)", Case-EIA=0402, Case-Metric=1005, Power=None, Technology=SMT, Tolerance=None
TP1 TP2 TP3 TP4 TP5 TP6 TP7 TP8 TP9 TP10 TP11: library part CMP-0484-00002-1, "Test Point, Surface Mount, Circular, Pad Diameter 1 mm"
U1: library part CMP-0450-00001-1, "Bluetooth Low Energy Single-mode IC, 64 KB RAM and 64 KB ROM, -30 to 85 degC, 32-pin QFN", I/O Supply Voltage (VDD_PADS)="1.2 to 3.6 V", Manufacturer=CSR, Operating Temperature="-30 to 85 degC", Baud Rate (max)="2Mbaud (<=1%Error)", Baud Rate (min)="1200 baud (<=2%Error)", Bits per byte=8, ComponentLink1Description="Manufacturer URL", ComponentLink1URL=http://csr.com/, ComponentLink2Description=Datasheet, ComponentLink2URL=https://www.csrsupport.com/download/39359/CSR1010%20Data%20Sheet%20CS-231985-DS.pdf, ComponentLink3Description="Package Specification", ComponentLink3URL=https://www.csrsupport.com/download/39359/CSR1010%20Data%20Sheet%20CS-231985-DS.pdf, DatasheetVersion="Rev. 4", Digital IO No.=12, Flow control="CTS / RTS", Memory Size="64KB RAM and 64KB ROM", Mounting Technology="Surface Mount", PackageDescription="32-Pin Quad Flat No-lead Package, Body 5x5mm, Pitch 0.5mm", PackageReference=QFN-32, Packing="Tape and Reel", PartNumber=CSR1010A05-IQQM-R, Stop bits No.="1 or 2"
U2: library part CMP-0159-01018-1, "512K bits I2C™ Serial EEPROM, 1.7 to 5.5 V, 400 kHz, -40 to 85 degC, 8-pin SOIC (SN8), Tube", Manufacturer=Microchip, ComponentLink1Description="Manufacturer URL", ComponentLink1URL=http://www.microchip.com, ComponentLink2Description=Datasheet, ComponentLink2URL=http://ww1.microchip.com/downloads/en/DeviceDoc/21754M.pdf, ComponentLink3Description="Package Specification", ComponentLink3URL=http://www.microchip.com/stellent/groups/techpub_sg/documents/packagingspec/en012702.pdf, ComponentLink4Description="Product URL", ComponentLink4URL=http://www.microchip.com/24AA512, DatasheetVersion="Rev. M", Mounting Technology="Surface Mount", PackageDescription="8-Lead Plastic Small Outline, 4.9 x 3.9 mm Body, 1.27 mm Pitch", PackageReference=SOIC-SN8, PackageVersion=C04-057C, PartNumber=24AA512-I/SN
U3: library part CMP-0234-00061-2, "MEMS motion sensor 3-axis - ± 2g/± 8g smart digital output nano accelerometer, -40 to +85°C, LGA-16 (3x3x1), Tape and Reel", Manufacturer=STMicroelectronics, ComponentLink1Description="Manufacturer URL", ComponentLink1URL=http://www.st.com/, ComponentLink2Description="LIS331DL Datasheet", ComponentLink2URL=http://www.st.com/internet/com/TECHNICAL_RESOURCES/TECHNICAL_LITERATURE/DATASHEET/CD00172345.pdf, ComponentLink3Description="LIS331DL Web Page", ComponentLink3URL=http://www.st.com/internet/analog/product/191236.jsp, DatasheetVersion="rev3, Apr-2008", PackageDescription="16-Pin Land Grid Array, 3 x 3 x 1 mm Body, 0.5 mm Pitch", PackageReference=LGA16-3X3X1, PackageVersion=2008, RevisionNote="PCB layout corrected."
U4: library part CMP-0237-00044-1, "STM32 ARM-based 32-bit MCU Access Line with 32 kB Flash, 6 kB Internal RAM, Internal Code A, -40 to +85°C Temperature, 36-Pin VFQFPN, Tray", ComponentLink1Description="STM32F101 Datasheet", ComponentLink1URL=http://www.st.com/internet/com/TECHNICAL_RESOURCES/TECHNICAL_LITERATURE/DATASHEET/CD00210837.pdf, ComponentLink2Description="STM32 Family Web Page", ComponentLink2URL=www.st.com/stm32, ComponentLink3Description="st.com Home", ComponentLink3URL=http://www.st.com/internet/com/home/home.jsp, DatasheetVersion="rev5.0, Apr-2011", PackageDescription="36-Pin Quad Flat No-Lead, 6 x 6 X 1.0 mm Body, 0.5 mm Pitch, Exposed Pad", PackageReference=VFQFPN36, PackageVersion=2011
X1: library part CMP-0464-00001-1, "Crystal, 16 MHz, -30 to 85 degC, 3.2 x 2.5 x 0.9 mm SMD", Frequency Tolerance="+/-20 ppm", Load Capacitance="10 pF", Manufacturer=ITTI, Nominal Frequency="16 MHz", Operating Temperature="-30 to 85 degC", ComponentLink1Description="Manufacturer URL", ComponentLink1URL=http://www.itti-co.com, Drive Level="100 max. uw", Mounting Technology="Surface Mount", Overtone Order=Fundamental, PackageDescription="4-Pin Hand Drawn, Body 3.2 x 2.5mm", PackageReference=21C00047-16.000MHz-4, PartNumber=21C00047-16.000MHz
X2 X3: library part CMP-0463-00001-1, "Crystal, 32.768 KHz, -40 to 85 degC, 3.2 x 1.5 x 0.9 mm SMD", Frequency Tolerance="+/-20 ppm", Load Capacitance="12.5 pF", Manufacturer=ITTI, Nominal Frequency=32.768KHz, Operating Temperature="-40 to 85 degC", ComponentLink1Description="Manufacturer URL", ComponentLink1URL=http://www.itti-co.com, Drive Level="1 max. uw", Mounting Technology="Surface Mount", PackageDescription="2-Pin Hand Drawn, Body 3.2 x 1.5mm, Pitch 2.5 mm", PackageReference=14340272-32.768KHz-2, PartNumber=14340272-32.768KHz

## Via types
v1: diameter 0.5, hole 0.3, Top Layer to Bottom Layer, tented both sides, 173 vias

## Nets (pads, with @x,y where several pads share a name; then routed paths per layer and width w, separated by ;. In a path a pad name is that pad's centre, name@x,y a point inside that pad or via, vN(x,y) a via of type N, cw(c..) or ccw(c..) an arc to the next point about the centre after c; other vN are vias at no path point)
16M_IN: C1.1 U1.10 X1.1 | length 5.2
  Top Layer w0.1: X1.1 -2.15,25.225 C1.1 -1.1,25.6 -0.9,25.8 -0.3,25.8 0.925,27.025 U1.10@1.575,27.025
16M_OUT: C2.1 U1.9 X1.3 | length 7.5
  Top Layer w0.1: X1.3 -4.125,26.3 -3.8,25.975 -1.2,25.975 -1.1,26.075 C2.1 -0.125,26.475 0.925,27.525 U1.9@1.575,27.525
32.768K_IN: C3.2 U1.3 X3.2 | length 5.9
  Top Layer w0.1: U1.3@4.85,28.3 4.85,28.775 5,28.925 5.217,28.925 5.617,29.325 6.2,29.325 6.35,29.475 C3.2 6.35,30.4 6.26,30.49 5.978,30.49 5.89,30.578 5.89,32.34 X3.2
32.768K_IN_Q1: C27.2 U4.2 X2.2 | length 6.8
  Top Layer w0.1: X2.2 -0.2,-7.85 -0.2,-5.5 0,-5.3 C27.2 0.475,-4.875 0.8,-4.55 1.95,-4.55 2.225,-4.275 U4.2
32.768K_OUT: C4.2 U1.2 X3.1 | length 6.8
  Top Layer w0.1: U1.2@5.35,28.3 5.35,28.775 5.7,29.125 7.25,29.125 7.6,29.475 C4.2 7.6,30.4 7.69,30.49 7.972,30.49 8.25,30.768 8.25,32.2 X3.1
32.768K_OUT_Q1: C28.2 U4.3 X2.1 | length 6
  Top Layer w0.1: X2.1 2.3,-7.85 2.3,-5.45 2.15,-5.3 C28.2 1.725,-4.875 1.85,-4.75 2.25,-4.75 2.725,-4.275 U4.3
ANT_RF: C26.2 FL1.2 | length 39.3
  Top Layer w0.5: FL1.2@-1.125,30.95 -1.125,33.3 -1.125,34.075 -1.125,40.05 0.375,40.05 0.375,37.25 1.875,37.25 1.875,40.05 3.375,40.05 3.375,37.25 4.875,37.25 4.875,40.05 6.375,40.05 6.375,37.25 7.875,37.25 7.875,40.05 12.275,40.05
BOOT0: R10.1 U4.35 | length 2.3
  Top Layer w0.1: R10.1@-1.425,-2.225 U4.35
BOOT1: R9.1 U4.17 | length 3
  Top Layer w0.1: U4.17 R9.1
BT_RF: C5.1 U1.7 | length 1.8
  Top Layer w0.25: C5.1 2.85,29.875 U1.7@2.85,28.3
CS_N: U3.8 U4.11 | length 3
  Top Layer w0.1: U4.11 U3.8
DIN: U3.7 U4.13 | length 3.2
  Top Layer w0.1: U4.13 8.675,-1.225 9.175,-1.725 U3.7
DOUT: U3.6 U4.14 | length 3.2
  Top Layer w0.1: U4.14 8.675,-0.725 9.175,-1.225 U3.6
GND: C1.2 C2.2 C3.1 C4.1 C6.1 C7.1 C8.1 C9.1 C10.1 C11.1 C12.1 C13.1 C14.1 C15.1 C16.2 C17.1 C18.2 C19.2 C20.1 C21.1 C22.1 C23.1 C24.1 C25.1 C26.1 C27.1 C28.1 FL1.1 FL1.3 J1.3 R9.2 R10.2 R11.2 R16.1 TP10.1 TP11.1 U1.33 U2.1 U2.2 U2.3 U2.4 U2.7 U3.5 U3.10 U3.12 U3.13 U3.16 U4.5 U4.18 U4.26 U4.36 U4.37 X1.2 X1.4 | length 101.6
  Top Layer w0.2: -5.5,24.85 X1.4 -4.15,24.825 v1(-4.15,23.5) ; v1(-4.2,29) C13.1 ; v1(-3.025,-6.525) C20.1 ; v1(-2.525,28.125) X1.2 -2.2,27.375 C2.2 v1(-0.3,27.375) ; R16.1 v1(-2.425,3.15) ; R10.2 v1(-2.425,-1.5) ; v1(-2.025,23.5) -1.45,23.5 -1.1,23.85 C1.2 ; v1(-1.65,-5.85) C23.1 ; v1(-0.35,29.475) -0.35,30.075 -0.225,30.2 FL1.1 0.6,30.2 0.75,30.05 v1(0.75,29.475) ; C26.1 v1(0.675,33.75) ; FL1.3 0.575,31.7 0.8,31.925 v1(0.8,32.45) ; v1(0.475,-7.025) C27.1 ; U4.36 1.725,-2.725 v1(2.075,-2.375) v1(3.175,-1.275) U4.37 ; 1.075,1.925 U4.37 ; v1(1.325,20.85) C7.1 C6.1 ; C22.1 v1(1.525,5.8) ; v1(1.725,-7.025) C28.1 ; U4.37@2.225,0.925 U4.26 ; v1(2.975,-7.025) C19.2 ; v1(3.65,-4.5) 3.725,-4.425 U4.5 U4.37 ; C11.1 v1(3.9,31.825) ; v1(4.1,24.675) v1(4.1,25.775) ; C12.1 v1(5.1,31.85) ; C24.1 v1(5.95,-6.55) ; C25.1 v1(5.95,-5.3) ; C3.1 C4.1 v1(7.6,31.775) ; v1(7.625,1.275) U4.18 5.725,1.275 U4.37 ; v1(8.7,-3.5) 9.65,-2.55 10.325,-2.55 v1(10.35,-2.525) 10.55,-2.725 U3.10 ; C8.1 v1(10.475,28.05) ; C10.1 C9.1 9.7,23.925 v1(10.525,23.925) ; R11.2 v1(10.525,22.8) ; U3.5 10.05,-0.825 v1(10.15,-0.925) ; R9.2 v1(10.6,2) ; v1(11.55,-1.225) U3.16 ; v1(11.55,-2.525) U3.12 U3.13 ; U2.4 12.775,33.32 v1(12.775,31.825) ; U2.3 14.04,32.135 14.35,31.825 v1(14.7,31.825) 15.12,31.825 15.31,32.015 U2.2 ; v1(14.675,0.375) C16.2 14.675,-1.725 C18.2 v1(15.5,-2.975) ; v1(14.675,29.95) 15.025,29.95 15.31,29.665 U2.7 ; 15.325,24.5 C15.1 v1(16.3,25.5) ; U2.1 16.58,31.87 v1(16.6,31.85)
  Mid-Layer 2 w0.2: v1(-2.1,21) -1.079,21 2.123,17.798 ; v1(5.6,12) 5.6,18.45 7.1,19.95 v1(10.125,19.95)
  Bottom Layer w0.2: v1(0.6,12) 1,12.4 1,13.45 ; v1(5.6,12) 5.6,18.45 7.1,19.95 v1(10.125,19.95) ; J1.3@6.375,1.775 v1(6.375,1.8)
  other v1: 0.6,-10.5 3.1,-10.5 5.6,-10.5 8.1,-10.5 10.6,-10.5 -1.9,-8 0.6,-8 3.1,-8 5.6,-8 8.1,-8 10.6,-8 13.1,-8 -4.4,-5.5 8.1,-5.5 10.6,-5.5 13.1,-5.5 15.6,-5.5 7.4,-3.9 4.375,-2.4 5.425,-2.4 3.175,-2.375 2.075,-1.275 2.075,-0.175 2.075,0.925 7.3,1.9 13.1,2 7.3,2.7 6.35,2.75 -4.4,4.5 8.1,4.5 10.6,4.5 13.1,4.5 15.6,4.5 5.8,5.8 -4.4,7 5.6,7 10.6,7 13.1,7 15.6,7 -1.9,9.5 0.6,9.5 3.1,9.5 5.6,9.5 8.1,9.5 10.6,9.5 13.1,9.5 3.1,12 8.1,12 10.6,12 12.6,21.5 14.6,23.5 2.95,24.675 5.15,24.675 2.975,25.775 5.125,25.775 -5.9,26.5 4.075,26.8 5.1,26.8 2.975,26.825 12.775,29.95 16.6,29.975 -5.9,30 -2.925,30.15 10.6,30.5 -2.95,32.9 -5.9,33 10.6,33 7.45,33.4 -4.4,35.1 -2.9,35.1 0.6,35.1 2.1,35.1 3.6,35.1 5.1,35.1 6.6,35.1 8.1,35.1 9.6,35.1 11.1,35.1 12.6,35.1 14.1,35.1 15.6,35.1
IO_Red_LED1: R3.1 U4.32 | length 51.2
  Top Layer w0.1: v1(-0.15,-0.725) U4.32
  Mid-Layer 2 w0.1: R3.1 -30.95,16 -31.25,15.7 -31.25,14.3 -31.025,14.075 0.825,14.075 1.375,13.525 1.375,8.475 -0.15,6.95 v1(-0.15,-0.725)
IO_Red_LED2: R4.1 U4.16 | length 43.9
  Top Layer w0.1: U4.16 v1@8.5,0.275
  Mid-Layer 2 w0.1: R4.1 -16.95,16 -17.3,15.65 -17.3,14.575 -17,14.275 0.908,14.275 1.575,13.608 1.575,8.392 0.1,6.917 0.1,5.8 1.3,4.6 6.817,4.6 8.6,2.817 v1(8.6,0.375)
IO_Red_LED3: R5.1 U4.15 | length 31.1
  Top Layer w0.1: U4.15 v1(8.6,-0.225)
  Mid-Layer 2 w0.1: R5.1 -2.95,16 -3.25,15.7 -3.25,14.725 -3,14.475 1,14.475 1.8,13.675 1.8,8.334 0.3,6.834 0.3,5.9 1.4,4.8 6.9,4.8 9.1,2.6 9.1,0.075 8.8,-0.225 v1(8.6,-0.225)
IO_Red_LED4: R6.1 U4.20 | length 21.8
  Top Layer w0.1: U4.20 5.225,5.825 6.175,6.775 v1(8.1,6.775)
  Mid-Layer 2 w0.1: v1(8.1,6.775) 9.1,7.775 9.1,13.5 10,14.4 14,14.4 14.425,14.825 14.425,15.725 14.15,16 R6.1
IO_Red_LED5: R7.1 U4.10 | length 40.7
  Top Layer w0.1: v1(6.6,-3.25) U4.10
  Mid-Layer 2 w0.1: v1(6.6,-3.25) 7.625,-3.25 8,-2.875 8,-1.476 9.3,-0.176 9.3,13.375 10.125,14.2 28.1,14.2 28.475,14.575 28.475,15.675 28.15,16 R7.1
IO_Red_LED6: R8.1 U4.7 | length 58.2
  Top Layer w0.1: v1(4.725,-4.5) U4.7
  Mid-Layer 2 w0.1: v1(4.725,-4.5) 7.65,-4.5 8.2,-3.95 8.2,-1.559 9.5,-0.259 9.5,13.175 10.3,13.975 42.25,13.975 42.475,14.2 42.475,15.675 42.15,16 R8.1
JTCK/SWCLK: R16.2 TP9.1 U4.28 | length 5.6
  Top Layer w0.1: R16.2 0,2.425 0.85,1.575 U4.28 ; R16.2 -1,2.85 TP9.1
JTDI: R13.1 TP6.1 U4.29 | length 8.9
  Top Layer w0.1: TP6.1 -1.925,5.5 -1.925,2.113 -1.762,1.95 -1.55,1.95 -1.425,1.825 R13.1 -0.925,1.375 -0.325,0.775 U4.29
JTDO: R15.1 TP8.1 U4.30 | length 8.3
  Top Layer w0.1: TP8.1 -3.25,2.209 -2.941,1.9 -2.138,1.9 -1.925,1.687 -1.925,1.063 -1.762,0.9 -1.55,0.9 -1.425,0.775 R15.1 -1.375,0.275 U4.30
JTMS/SWDIO: R14.1 TP7.1 U4.25 | length 7.9
  Top Layer w0.1: TP7.1 1.325,6.825 2.125,6.025 2.125,4.075 2.225,3.975 2.675,3.975 2.725,3.925 U4.25
NetC5_2: C5.2 FL1.4 | length 1.2
  Top Layer w0.3: FL1.4 C5.2
NetLED1_2: LED1.2 R3.2 | length 1.1
  Mid-Layer 2 w0.1: R3.2 -30.25,15.15 LED1.2
NetLED2_2: LED2.2 R4.2 | length 1.1
  Mid-Layer 2 w0.1: R4.2@-16.4,14.975 -16.225,15.15 LED2.2
NetLED3_2: LED3.2 R5.2 | length 1.1
  Mid-Layer 2 w0.1: R5.2 -2.25,15.15 LED3.2
NetLED4_2: LED4.2 R6.2 | length 1.1
  Mid-Layer 2 w0.1: LED4.2 13.45,15.15 R6.2
NetLED5_2: LED5.2 R7.2 | length 1.1
  Mid-Layer 2 w0.1: LED5.2 27.45,15.15 R7.2
NetLED6_2: LED6.2 R8.2 | length 1.1
  Mid-Layer 2 w0.1: LED6.2 41.45,15.15 R8.2
NJTRST: R12.1 U4.31 | length 2.5
  Top Layer w0.1: R12.1 -0.925,-0.7 -0.45,-0.225 U4.31
NRST: C19.1 U4.4 | length 1.8
  Top Layer w0.1: C19.1 2.975,-4.525 3.225,-4.275 U4.4
PA1: U3.11 U4.8 | length 7.7
  Top Layer w0.1: U4.8 5.225,-4.275 5.625,-4.675 10.275,-4.675 11.05,-3.9 U3.11
PA2: U3.9 U4.9 | length 6
  Top Layer w0.1: U4.9 5.725,-4.25 5.95,-4.475 9.45,-4.475 10.05,-3.875 U3.9
PB6: U4.33
PB7: U4.34
PIO2: C15.2 R1.2 R2.2 U1.27 U2.8 | length 13.1
  Top Layer w0.1: U1.27@6.625,25.025 7.175,25.025 v1(7.9,24.3) ; v1(12.25,25.275) 12.425,25.45 R1.2 R2.2 14.6,25.45 14.725,25.575 14.725,26.25 14.875,26.4 C15.2 15.75,26.4 16.58,27.23 U2.8
  Mid-Layer 2 w0.1: v1(7.9,24.3) 8.875,25.275 v1(12.25,25.275)
SCL: R2.1 U1.28 U2.6 | length 10.8
  Top Layer w0.1: U1.28@6.625,25.525 7.275,25.525 v1(7.9,24.9) ; v1(12.25,25.875) 13.975,25.875 14.175,26.075 R2.1 14.175,27.075 14.04,27.21 U2.6
  Mid-Layer 2 w0.1: v1(7.9,24.9) 8.875,25.875 v1(12.25,25.875)
SCLK: U3.4 U4.12 | length 5.4
  Top Layer w0.1: U4.12 v1(8.6,-1.725) ; v1@10.35,-1.75 v1@10.35,-1.7 ; v1(10.35,-1.725) 10.55,-1.525 U3.4
  Mid-Layer 2 w0.1: v1(8.6,-1.725) v1(10.35,-1.725)
SDA: R1.1 U1.29 U2.5 | length 9.3
  Top Layer w0.1: U1.29@6.625,26.025 7.375,26.025 v1(7.9,25.5) ; v1(12.25,26.475) 13.125,26.475 13.125,26.85 12.77,27.205 U2.5
  Mid-Layer 2 w0.1: v1(7.9,25.5) 8.875,26.475 v1(12.25,26.475)
SMPS_LX: L1.1 U1.31 | length 2
  Top Layer w0.2: U1.31@6.625,27.025 7.525,27.025 7.925,26.625 L1.1
SPI_CLK: TP2.1 U1.18 | length 5.1
  Top Layer w0.1: U1.18@2.85,23.25 2.85,22.475 5.35,19.975 TP2.1
SPI_CS: TP3.1 U1.19 | length 6.9
  Top Layer w0.1: U1.19@3.35,23.25 3.35,22.292 5.317,20.325 6.9,20.325 TP3.1
SPI_IN: TP4.1 U1.20 | length 3
  Top Layer w0.1: U1.20@3.85,23.25 3.85,22.075 4.525,21.4 TP4.1
SPI_OUT: TP5.1 U1.22 | length 4.3
  Top Layer w0.1: U1.22@4.85,23.25 4.85,22.6 5.4,22.05 7.4,22.05 TP5.1
SPI_PIO: TP1.1 U1.26 | length 6.6
  Top Layer w0.1: U1.26@6.625,24.525 7.11,24.525 7.435,24.2 7.435,22.44 7.7,22.175 10.05,22.175 TP1.1
UART_CTS: U1.16 U4.23 | length 25.9
  Top Layer w0.1: v1(-0.8,22.3) 0.925,24.025 U1.16@1.575,24.025 ; U4.23 v1(3.725,6.775)
  Mid-Layer 2 w0.1: v1(-0.8,22.3) 4.625,16.875 4.625,7.958 3.725,7.058 v1(3.725,6.775)
UART_RTS: U1.17 U4.24 | length 24.4
  Top Layer w0.1: v1(2.35,22.3) U1.17@2.35,23.25 ; U4.24 v1(3.225,5.8)
  Mid-Layer 2 w0.1: v1(2.35,22.3) 2.35,19.725 4.825,17.25 4.825,7.975 5.125,7.675 5.125,6.025 4.4,5.3 3.725,5.3 v1(3.225,5.8)
UART_RX: U1.14 U4.22 | length 28.6
  Top Layer w0.1: v1(-2.025,22.3) 0.7,25.025 U1.14@1.575,25.025 ; U4.22 v1(4.225,5.8)
  Mid-Layer 2 w0.1: v1(-2.025,22.3) 4.225,16.05 4.225,8.124 3.125,7.024 3.125,6.526 3.851,5.8 v1(4.225,5.8)
UART_TX: U1.15 U4.21 | length 28.9
  Top Layer w0.1: v1(-1.425,22.3) 0.8,24.525 U1.15@1.575,24.525 ; U4.21 v1(4.725,6.775)
  Mid-Layer 2 w0.1: v1(-1.425,22.3) 4.425,16.45 4.425,8.041 3.325,6.941 3.325,6.609 3.684,6.25 4.2,6.25 v1(4.725,6.775)
VBAT: C6.2 C7.2 C8.2 C16.1 C17.2 C18.1 C20.2 C21.2 C22.2 C23.2 C24.2 C25.2 J1.1 J1.2 L2.1 LED1.1 LED2.1 LED3.1 LED4.1 LED5.1 LED6.1 R12.2 R13.2 R14.2 R15.2 U1.21 U1.32 U3.1 U3.14 U3.15 U4.1 U4.6 U4.19 U4.27 | length 206.5
  Top Layer w0.2: C20.2 -3.25,-3.8 -3.25,-0.975 -2.975,-0.7 R12.2 R15.2 R13.2 ; v1(-0.975,-4.05) -0.525,-3.6 U4.1 ; v1(0.7,4.025) C22.2 1.725,3.825 U4.27 ; v1(2.625,5.8) 2.675,5.75 R14.2 ; v1(3.75,19.6) C6.2 C7.2 v1(3.75,20.85) ; v1(4.225,-7.5) C24.2 C25.2 U4.6 ; v1(4.35,22.3) U1.21@4.35,23.25 ; U4.19 5.725,3.95 C21.2 v1(6.625,4.025) ; U1.32@6.625,27.525 7.775,27.525 8.3,28.05 C8.2 8.95,28.25 8.95,28.375 9.3,28.725 L2.1 v1(10.45,29.05) ; U3.1 13.575,-0.225 C16.1 ; U3.14 U3.15 C17.2 ; v1(13.775,-3.8) C18.1 C17.2 ; C16.1@13.775,-0.475 C17.2
  Top Layer w0.5: v1(-5.375,-2.47) -3.795,-4.05 C23.2 ; C20.2 -3,-4.05 C23.2 ; v1(-0.975,-4.05) C23.2 ; C16.1 v1(13.775,1)
  Mid-Layer 2 w0.2: LED1.1 -29.4,16.45 -29.05,16.8 -2.975,16.8 2.8,16.8 3.1,16.8 3.75,16.15 v1(3.75,11.3) ; LED2.1 -15.4,16.375 -14.975,16.8 ; LED3.1 -1.4,16.6 -1.2,16.8 ; v1(6.4,11.3) 6.4,16.025 7.175,16.8 40.2,16.8 40.6,16.4 LED6.1 ; 12.225,16.8 12.6,16.425 LED4.1 ; 26.15,16.8 26.6,16.35 LED5.1
  Bottom Layer w0.2: v1(3.75,19.6) 3.75,12.625 ; v1(4.35,22.3) 3.75,21.7 v1(3.75,20.85) 10.95,20.85 12.7,22.6 12.7,27.3 10.95,29.05 v1(10.45,29.05) ; v1(6.4,11.3) v1(3.75,11.3) 3.75,12.625 ; v1(6.625,4.025) 4.364,4.025 2.625,5.764 v1(2.625,5.8) ; v1(13.775,-3.8) 13.775,-6.7 12.975,-7.5 v1(4.225,-7.5) -0.075,-7.5 -0.975,-6.6 v1(-0.975,-4.05) -0.975,2.35 v1(0.7,4.025) 0.85,4.025 v1(2.625,5.8) ; v1(2.625,5.8) 2.625,7.875 3.75,9 3.75,12.625
  Bottom Layer w0.5: J1.2 -5.385,-2.46 v1(-5.375,-2.47) ; v1(13.775,1) J1.1
VDD_BAT: C14.2 L2.2 U1.1 | length 4
  Top Layer w0.2: U1.1@5.85,28.3 7.225,28.3 7.975,29.05 L2.2 8.575,29.225 8.575,29.825 C14.2
VDD_CORE: C9.2 C10.2 U1.5 U1.30 | length 15.3
  Top Layer w0.2: v1(3.825,29.325) 3.85,29.3 U1.5@3.85,28.3 ; U1.30@6.625,26.525 7.45,26.525 8.025,25.95 8.475,25.95 8.775,25.65 C10.2 C9.2 8.675,23.85 8,23.85 7.875,23.725 v1@7.875,23.425
  Mid-Layer 2 w0.2: v1(3.825,29.325) 3.825,28.875 4.9,27.8 6.475,27.8 7.15,27.125 7.15,23.825 7.575,23.4 v1(7.9,23.4)
VDD_REG_IN: C11.2 C12.2 L1.2 U1.6 | length 11.9
  Top Layer w0.2: U1.6@3.35,28.3 3.35,29.9 3.5,30.05 C11.2 C12.2 5.025,29.975 v1(5.025,29.325) ; L1.2 9.975,27.25 10.15,27.425 v1(10.475,27.425)
  Mid-Layer 2 w0.2: v1(5.025,29.325) 5.025,28.875 5.5,28.4 6.724,28.4 7.699,27.425 v1(10.475,27.425)
VDD_XTAL: C13.2 U1.8 | length 5.1
  Top Layer w0.2: C13.2 -1.35,29 -0.65,28.3 U1.8@2.35,28.3
WAKE: R11.1 U1.4 | length 11.3
  Top Layer w0.2: U1.4@4.35,28.3 4.35,29.25 v1(4.425,29.325) ; v1(7.9,22.8) R11.1
  Mid-Layer 2 w0.2: v1(4.425,29.325) 4.425,28.825 5.15,28.1 6.599,28.1 7.45,27.249 7.45,24.114 7.714,23.85 8.086,23.85 8.35,23.586 8.35,23.214 7.936,22.8 v1(7.9,22.8)
pads on no net: U1.11 U1.12 U1.13 U1.23 U1.24 U1.25 U3.2 U3.3

## Polygon pours and split planes (outlines as drawn)
GND on Top Layer "GND" (hatched Horizontal grid 0.1 track 0.1, remove dead copper, pour order 14): 11.111,12.774 11.087,12.75 0.007,12.735 ccw(c5.6,1)
GND on Top Layer "GND" (hatched Horizontal grid 0.1 track 0.1, remove dead copper, pour order 18): 0.038,18.25 cw(c5.6,30) -6.248,35.349 17.448,35.349 cw(c5.6,30) 11.162,18.25
GND on Mid-Layer 1 "GND" (hatched Horizontal grid 0.1 track 0.1, remove dead copper, pour order 11): 11.152,12.755 0.08,12.755 0.068,12.764 ccw(c5.6,1)
GND on Mid-Layer 1 "GND" (hatched Horizontal grid 0.1 track 0.1, remove dead copper, pour order 17): 0.038,18.25 cw(c5.6,30) -6.248,35.349 17.448,35.349 cw(c5.6,30) 11.162,18.25
GND on Mid-Layer 2 "GND" (hatched Horizontal grid 0.1 track 0.1, remove dead copper, pour order 13): 0.6,13 ccw(c5.6,1) 10.6,13
GND on Mid-Layer 2 "GND" (hatched Horizontal grid 0.1 track 0.1, remove dead copper, pour order 16): 0.6,18 cw(c5.6,30) -6.248,35.349 17.448,35.349 cw(c5.6,30) 10.6,18
GND on Mid-Layer 2 "GND" (hatched Horizontal grid 0.1 track 0.1, remove dead copper, pour order 20): -34.4,17.5 0.6,17.5 0.6,18 10.6,18 10.6,17.5 45.6,17.5 45.6,13.5 10.6,13.5 10.6,13 0.6,13 0.6,13.5 -34.4,13.5 -34.4,17.5
GND on Bottom Layer "GND" (hatched Horizontal grid 0.1 track 0.1, remove dead copper, pour order 12): 0.6,13 ccw(c5.6,1) 10.6,13
GND on Bottom Layer "GND" (hatched Horizontal grid 0.1 track 0.1, remove dead copper, pour order 15): 0.6,18 cw(c5.6,30) -6.248,35.349 17.448,35.349 cw(c5.6,30) 10.6,18
GND on Bottom Layer "GND" (hatched Horizontal grid 0.1 track 0.1, remove dead copper, pour order 19): -34.4,17.5 0.6,17.5 0.6,18 10.6,18 10.6,17.5 45.6,17.5 45.6,13.5 10.6,13.5 10.6,13 0.6,13 0.6,13.5 -34.4,13.5 -34.4,17.5

## Keep-outs
Keep-Out Layer:
  the board outline again, w0.1

## Other copper
Top Layer:
  pour cut-out: 5.425,32.175 5.425,30.55 3.575,30.55 3.575,32.175
Multi-Layer:
  pour cut-out: 3.25,28.725 2.1,28.725 2.1,31.6 3.25,31.6
  pour cut-out: -0.6,30.375 -0.6,31.5 3.25,31.5 3.25,30.375
  pour cut-out: -2.1,35.4 -0.1,35.4 -0.1,30.2 -2.1,30.2

## Silkscreen, mask and mechanical layers (free items; w line width, h text height)
Top Overlay:
  circle w0.254: c11.246,6.959 r2.357
  lines w0.254: 9.569,8.584 12.859,5.295
  text "Pb" at 9.849,6.095 h1.78
Bottom Overlay:
  region: 12.465,29.509 11.881,29.509 11.881,28.925 12.465,28.925
  region: 12.465,30.957 11.881,30.957 11.881,30.372 12.465,30.372
  lines w0.127: -2.216,28.518 12.871,28.518 12.871,31.388 ; -2.216,28.519 -2.216,31.388 ; -2.216,29.966 12.871,29.966 ; -2.216,31.403 12.871,31.403 ; 2.229,28.544 2.229,31.363 ; 5.988,28.518 5.988,31.388 ; 11.434,28.518 11.434,31.403
  text "COMPLIANCE:" at 12.744,31.769 h1.27
  text "CLASS 2" at 1.873,30.347 h1.02
  text "IPC-A-600G" at 11.119,30.347 h1.02
  text "CLASS 2" at 1.873,28.925 h1.02
  text "TYPE 3" at 5.683,28.925 h1.02
  text "IPC-6012D" at 11.119,28.925 h1.02
  text "Bluetooth Sentinel" at 14.302,25.363 h2.29
  text "Designed by Altium" at 14.302,23.839 h1.02
Mechanical 1:
  lines w0.254: -16.9,13.5 -16.9,17.5 ; 28.1,13.5 28.1,17.5
Mechanical 13:
  the board outline again, w0.1
Mechanical 16:
  drawing of 2241 lines, arcs and shapes, not listed
  text "1" at -54.054,107.761 h1.78
  text "2" at 18.59,107.761 h1.78
  text "3" at 91.742,107.761 h1.78
  text "4" at 164.64,107.761 h1.78
  text "A" at -88.395,84.749 h1.78
  text "A" at 198.625,84.749 h1.78
  text "Layer" at 59.509,42.775 h2
  text "Name" at 70.85,42.775 h2
  text "Material" at 96.074,42.775 h2
  text "Thickness" at 117.889,42.775 h2
  text "Constant" at 134.858,42.775 h2
  text "Rigid" at 151.018,42.775 h2
  text "Flex" at 164.53,42.775 h2
  text "Top Overlay" at 70.85,38.775 h2
  text "B" at -88.395,36.692 h1.78
  text "B" at 198.625,36.692 h1.78
  text "Top Solder" at 70.85,34.775 h2
  text "Solder Resist" at 96.074,34.775 h2
  text "0.010mm" at 117.889,34.775 h2
  text "3.5" at 134.858,34.775 h2
  text "1" at 59.509,30.775 h2
  text "Top Layer" at 70.85,30.775 h2
  text "0.036mm" at 117.889,30.775 h2
  text "Dielectric 1" at 70.85,26.775 h2
  text "FR-4" at 96.074,26.775 h2
  text "0.320mm" at 117.889,26.775 h2
  text "4.8" at 134.858,26.775 h2
  text "2" at 59.509,22.775 h2
  text "Mid-Layer 1" at 70.85,22.775 h2
  text "0.036mm" at 117.889,22.775 h2
  text "Dielectric 2" at 70.85,18.775 h2
  text "FR-4" at 96.074,18.775 h2
  text "0.320mm" at 117.889,18.775 h2
  text "4.8" at 134.858,18.775 h2
  text "3" at 59.509,14.775 h2
  text "Mid-Layer 2" at 70.85,14.775 h2
  text "0.036mm" at 117.889,14.775 h2
  text "Dielectric 3" at 70.85,10.775 h2
  text "Polyamide" at 96.074,10.775 h2
  text "0.012mm" at 117.889,10.775 h2
  text "4.8" at 134.858,10.775 h2
  text "4" at 59.509,6.775 h2
  text "Bottom Layer" at 70.85,6.775 h2
  text "0.036mm" at 117.889,6.775 h2
  text "Bottom Solder" at 70.85,2.775 h2
  text "Solder Resist" at 96.074,2.775 h2
  text "0.010mm" at 117.889,2.775 h2
  text "3.5" at 134.858,2.775 h2
  text "Bottom Overlay" at 70.85,-1.225 h2
  text "C" at -88.395,-11.822 h1.78
  text "C" at 198.625,-11.822 h1.78
  text "ENGINEER:" at 83.69,-48.83 h1.14
  text "TITLE:" at 121.79,-48.83 h1.14
  text "PCB DESIGNER:" at 83.69,-56.323 h1.14
  text "Bluetooth Sentinel" at 128.475,-56.475 h10
  text "D" at -88.395,-59.828 h1.78
  text "D" at 198.625,-59.828 h1.78
  text "DATE:" at 83.69,-64.07 h1.14
  text "PART NO.:" at 121.79,-64.07 h1.14
  text "REV:" at 175.13,-64.07 h1.14
  text "Altium Limited" at 50.67,-66.61 h1.78
  text ".PRINT_DATE" at 84.96,-67.118 h1.78
  text "IBP Shanghai, L3 - B3" at 50.67,-69.15 h1.78
  text "No. 168 Linhong Road" at 50.67,-71.69 h1.78
  text "FILE NAME:" at 83.69,-71.69 h1.14
  text "DWG NO:" at 121.79,-71.69 h1.14
  text "SCALE:" at 175.13,-71.69 h1.14
  text "Shanghai 200335, China" at 50.67,-74.23 h1.78
  text ".PCB_FILE_NAME_NO_PATH" at 84.96,-74.738 h1.78
  text "1" at -54.054,-80.199 h1.78
  text "2" at 18.59,-80.199 h1.78
  text "3" at 91.742,-80.199 h1.78
  text "4" at 164.64,-80.199 h1.78

## Dimensions
10.6,17.754 to 45.6,17.246 on Mechanical 1
0.6,18.008 to -34.4,17.5 on Mechanical 1
10.6,17.5 to 28.1,17.5 on Mechanical 1
0.6,17.5 to -16.9,17.5 on Mechanical 1

## Text inside footprints (layer, text, board x,y; h text height)
J1: Bottom Overlay "CR2032" at 9.283,-7.382 h1.27